# EAGLE board project-tsc-2d-pcb (EAGLE 9.7.0)
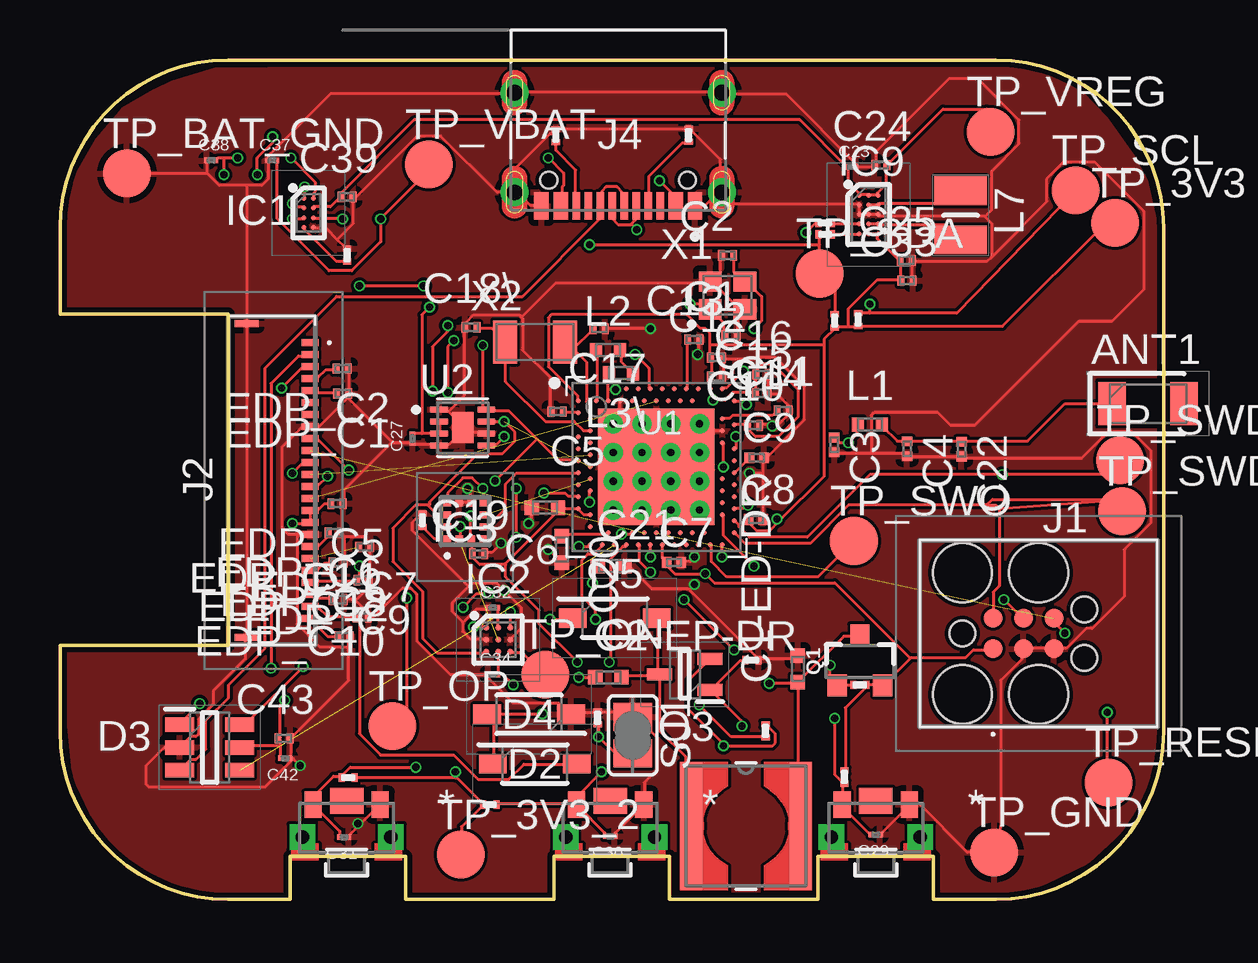
[diagram p0: board, top side]
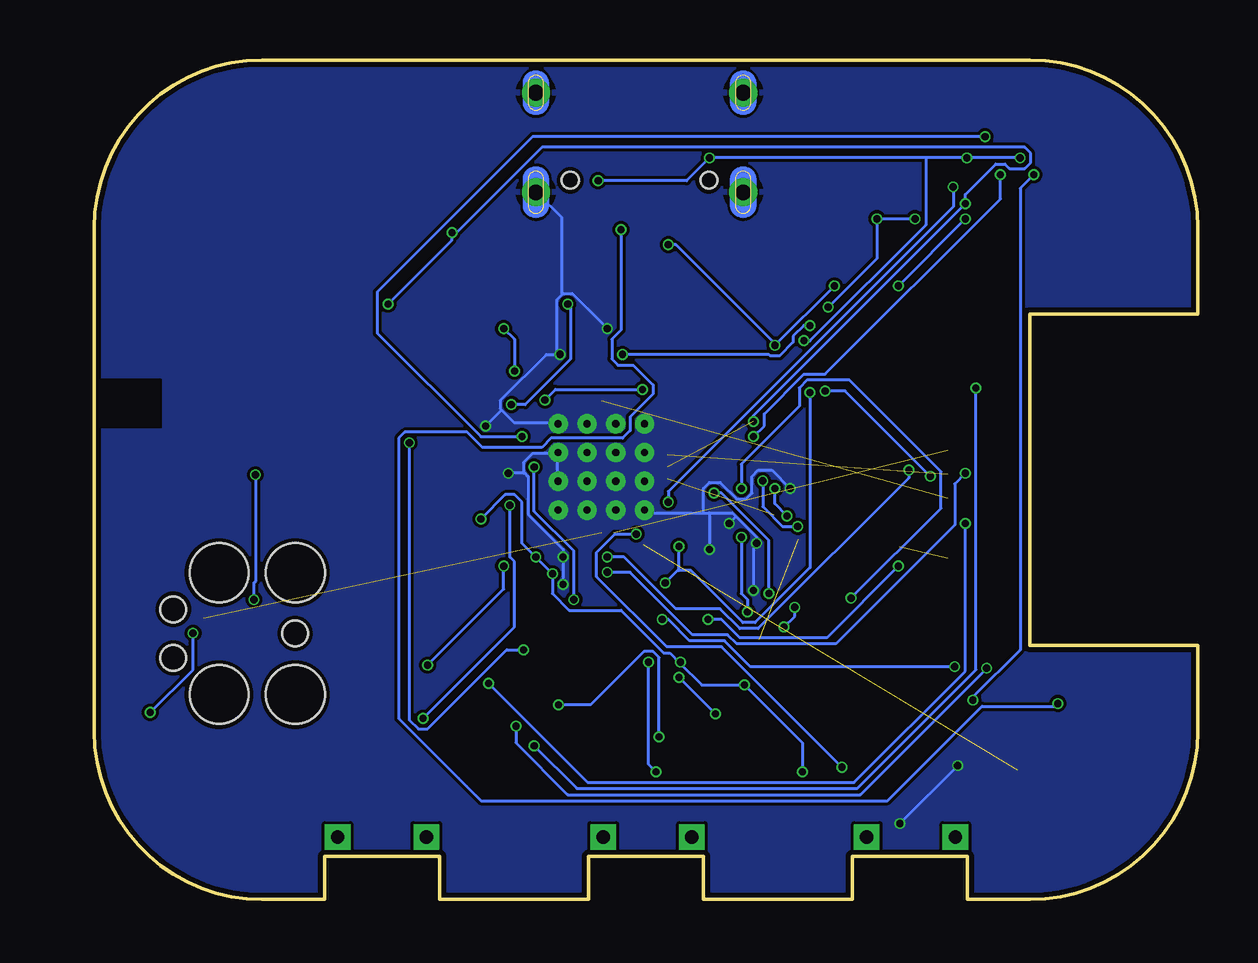
[diagram p1: board, bottom side, seen from below]

Size 46 x 35 mm. Coordinates in mm from the lower left corner, seen from the top.
Outline: 39,0 36.4,0 36.4,1.8 31.6,1.8 31.6,0 25.4,0 25.4,1.8 20.6,1.8 20.6,0 14.4,0 14.4,1.8 9.6,1.8 9.6,0 7,0 arc-90 0,7 0,10.6 7,10.6 7,24.4 0,24.4 0,28 arc-90 7,35 39,35 arc-90 46,28 46,7 arc-90 39,0
Copper layers (1*16): Top 0.035mm / dielectric 1.6mm / Bottom 0.035mm
Design rules "jlcpcb-2layers.dru": minimum track width 5mil, minimum drill 0.3mm, track to track 5mil, track to pad 5mil, pad to pad 5mil, via to via 5mil, smd to smd 5mil, copper to edge 0.2mm, drill to drill 6mil, minimum pad ring 10mil, minimum via ring 3mil, stop-mask expansion 4mil, vias tented up to drill 0mil, thermal gap 10mil

## Footprints (pad centres in the part's own frame; a part is rotated, then mirrored left to right if it is on the bottom)
2450AT18B100E_ANTC3216X140N = smd 1.15 x 1.8: 1 -1.5,0; 2 1.5,0
NORDIC_NRF_3_RESC0201_L = smd 0.28 x 0.43: 1 -0.255,0; 2 0.255,0
NORDIC_NRF_3_RESC0402_N = smd 0.6 x 0.6: 1 -0.55,0; 2 0.55,0
NORDIC_NRF_3_RESC0201_N = smd 0.4 x 0.45: 1 -0.305,0; 2 0.305,0
GRM011R60J152KE01L_2_CAPC0201X13N = smd 0.22 x 0.23: 1 -0.185,0; 2 0.185,0
ESP32_C6_LIBRARY_5_SOD3716X135N = smd 1.15 x 0.8: 1 -1.75,0; 2 1.75,0
ESP32_C6_LIBRARY_3_SOT95P280X145-6N = smd 1.2 x 0.6: 1 -1.25,0.95; 2 -1.25,0; 3 -1.25,-0.95; 4 1.25,-0.95; 5 1.25,0; 6 1.25,0.95
BQ25180YBGR_BGA8C40P2X4_100X155X50 = smd 0.2 x 0.2: A1 -0.2,0.6; A2 0.2,0.6; B1 -0.2,0.2; B2 0.2,0.2; C1 -0.2,-0.2; C2 0.2,-0.2; D1 -0.2,-0.6; D2 0.2,-0.6
DRV2605YZFR_BGA9C50P3X3_144X144X62 = smd 0.25 x 0.25: A1 -0.5,0.5; A2 0,0.5; A3 0.5,0.5; B1 -0.5,0; B2 0,0; B3 0.5,0; C1 -0.5,-0.5; C2 0,-0.5; C3 0.5,-0.5
BMA423_BMA423 = smd 0.3 x 0.35: 1 -0.75,-0.775; 2 -0.25,-0.775; 3 0.25,-0.775; 4 0.75,-0.775; 7 0.75,0.775; 8 0.25,0.775; 9 -0.25,0.775; 10 -0.75,0.775 | smd 0.35 x 0.3: 5 0.775,-0.25; 6 0.775,0.25; 11 -0.775,0.25; 12 -0.775,-0.25
RT6160AWSC_BGA15C40P3X5_140X230X60 = smd 0.216 x 0.216: A1 -0.4,0.8; A2 0,0.8; A3 0.4,0.8; B1 -0.4,0.4; B2 0,0.4; B3 0.4,0.4; C1 -0.4,0; C2 0,0; C3 0.4,0; D1 -0.4,-0.4; D2 0,-0.4; D3 0.4,-0.4; E1 -0.4,-0.8; E2 0,-0.8; E3 0.4,-0.8
TC2030-IDC_TC2030IDC = smd 0.783 x 0.783: 1 -0.953,-0.635; 2 -0.953,0.635; 3 0.317,-0.635; 4 0.317,0.635; 5 1.588,-0.635; 6 1.588,0.635 | hole 2.451: -2.223,-2.54; -2.223,2.54; 0.952,-2.54; 0.952,2.54 | hole 1.067: -2.223,0; 2.857,-1.016; 2.857,1.016
503480-2400_5034802400 = smd 0.3 x 0.7: 1 -5.75,1.525; 2 -5.25,1.525; 3 -4.75,1.525; 4 -4.25,1.525; 5 -3.75,1.525; 6 -3.25,1.525; 7 -2.75,1.525; 8 -2.25,1.525; 9 -1.75,1.525; 10 -1.25,1.525; 11 -0.75,1.525; 12 -0.25,1.525; 13 0.25,1.525; 14 0.75,1.525; 15 1.25,1.525; 16 1.75,1.525; 17 2.25,1.525; 18 2.75,1.525; 19 3.25,1.525; 20 3.75,1.525; 21 4.25,1.525; 22 4.75,1.525; 23 5.25,1.525; 24 5.75,1.525 | smd 0.3 x 1: MP1 -6.54,-1.125; MP2 6.54,-1.125
KH-TYPE-C-16P_KINGHELM_KH-TYPE-C-16P = smd 0.6 x 1.15: A1_B12 -3.2,4.725; A4_B9 -2.4,4.725; A9_B4 2.4,4.725; A12_B1 3.2,4.725 | smd 0.3 x 1.15: A5 -1.25,4.725; A6 -0.25,4.725; A7 0.25,4.725; A8 1.25,4.725; B5 1.75,4.725; B6 0.75,4.725; B7 -0.75,4.725; B8 -1.75,4.725 | drill 0.65 pad 1.05: SH1 -4.32,0; SH2 4.32,0; SH3 -4.32,4.15; SH4 4.32,4.15 | hole 0.7: -2.89,3.65; 2.89,3.65
NORDIC_NRF_2_RESC0402_L = smd 0.5 x 0.6: 1 -0.5,0; 2 0.5,0
ESP32_C6_LIBRARY_2_IND_4828-WE-TPC_WRE = smd 0.9 x 5.3: 1 -2.286,0; 2 2.286,0
MLP2016SR47MT0S1_INDC2016X100N = smd 1.2 x 2.2: 1 -1.028,0; 2 1.028,0
ESP32_C6_LIBRARY_4_ESP32_C6_LIBRARY_4_ESP32_C6_LIBRARY_4_ESP32_C6_LIBRARY_4_ESP32_WROVER_SPARKFUN-DISCRETESEMI_SOT23-3 = smd 0.8 x 0.9: 1 -0.95,-1; 2 0.95,-1; 3 0,1.1
ESP32_C6_LIBRARY_6_SOT65P210X110-3N = smd 1.05 x 0.5: 1 -1.05,0.65; 2 -1.05,-0.65; 3 1.05,0
CPF0201D7K68C1_0201 = smd 0.35 x 0.25: 1 0,0.275; 2 0,-0.275
ESP32_C6_LIBRARY_7_JUMPER_SJ = smd 1.168 x 1.6: 1 -0.762,0; 2 0.762,0
2025-10-22_07-23-44_LIBRARY_SW_EVP-AKE31A_PAN = smd 0.711 x 1.092: 1 -1.4,-0.972; 2 1.4,-0.972 | drill 0.559 pad 0.914 square: 3 -1.848,0.381; 4 1.848,0.381 | smd 1.397 x 1.092: 5 0,-1.124
HECTOR_WATCH_1_TP20R = smd 2 x 2: TP 0,0
NORDIC_NRF_4_AQFN50P700X700X85_HS-74N = smd 4.85 x 4.85: P$74 0,0 | drill 0.3 pad 0.6: P$75 -1.8,1.8; P$76 -0.6,1.8; P$77 0.6,1.8; P$78 1.8,1.8; P$79 -1.8,0.6; P$80 -0.6,0.6; P$81 0.6,0.6; P$82 1.8,0.6; P$83 -1.8,-0.6; P$84 -0.6,-0.6; P$85 0.6,-0.6; P$86 1.8,-0.6; P$87 -1.8,-1.8; P$88 -0.6,-1.8; P$89 0.6,-1.8; P$90 1.8,-1.8 | smd 0.2 x 0.2: P$A8 -1.25,3.25; P$A10 -0.75,3.25; P$A12 -0.25,3.25; P$A14 0.25,3.25; P$A16 0.75,3.25; P$A18 1.25,3.25; P$A20 1.75,3.25; P$A22 2.25,3.25; P$A23 2.75,3.25; P$AA24 3.25,-2.25; P$AB2 -2.75,-2.5; P$AC5 -2,-2.75; P$AC9 -1,-2.75; P$AC11 -0.5,-2.75; P$AC13 0,-2.75; P$AC15 0.5,-2.75; P$AC17 1,-2.75; P$AC19 1.5,-2.75; P$AC21 2,-2.75; P$AC24 3.25,-2.75; P$AD2 -2.75,-3.25; P$AD4 -2.25,-3.25; P$AD6 -1.75,-3.25; P$AD8 -1.25,-3.25; P$AD10 -0.75,-3.25; P$AD12 -0.25,-3.25; P$AD14 0.25,-3.25; P$AD16 0.75,-3.25; P$AD18 1.25,-3.25; P$AD20 1.75,-3.25; P$AD22 2.25,-3.25; P$AD23 2.75,-3.25; P$B1 -3.25,2.75; P$B3 -2.5,2.75; P$B5 -2,2.75; P$B7 -1.5,2.75; P$B9 -1,2.75; P$B11 -0.5,2.75; P$B13 0,2.75; P$B15 0.5,2.75; P$B17 1,2.75; P$B19 1.5,2.75; P$B24 3.25,2.75; P$C1 -3.25,2.25; P$D2 -2.75,2; P$D23 2.75,2; P$E24 3.25,1.75; P$F2 -2.75,1.5; P$F23 2.75,1.5; P$G1 -3.25,1.25; P$H2 -2.75,1; P$H23 2.75,1; P$J1 -3.25,0.75; P$J24 3.25,0.75; P$K2 -2.75,0.5; P$L1 -3.25,0.25; P$L24 3.25,0.25; P$M2 -2.75,0; P$N1 -3.25,-0.25; P$N24 3.25,-0.25; P$P2 -2.75,-0.5; P$P23 2.75,-0.5; P$R1 -3.25,-0.75; P$R24 3.25,-0.75; P$T2 -2.75,-1; P$T23 2.75,-1; P$U1 -3.25,-1.25; P$U24 3.25,-1.25; P$V23 2.75,-1.5; P$W1 -3.25,-1.75; P$W24 3.25,-1.75; P$Y2 -2.75,-2; P$Y23 2.75,-2
ESP32_C6_LIBRARY_SON50P200X200X80-9N = smd 0.76 x 0.27: 1 -0.985,0.75; 2 -0.985,0.25; 3 -0.985,-0.25; 4 -0.985,-0.75; 5 0.985,-0.75; 6 0.985,-0.25; 7 0.985,0.25; 8 0.985,0.75 | smd 0.9 x 1.3: 9 0,0
NORDIC_NRF_BT-XTAL_2016_N = smd 0.95 x 0.85: 1 -0.725,-0.575; 2 0.725,-0.575; 3 0.725,0.575; 4 -0.725,0.575
NORDIC_NRF_1_XTAL_3215_N = smd 1 x 1.8: 1 -1.25,0; 2 1.25,0

## Placement (x,y rotation side)
ANT1  2450AT18B100E  [2450AT18B100E_ANTC3216X140N]  45.35,20.67 0 top
C1  12pF  [NORDIC_NRF_3_RESC0201_L]  27.97,23.51 0 top
C1-ED-DR  10uF  [NORDIC_NRF_3_RESC0402_N]  30.75,9.62 90 top
C2  12pF  [NORDIC_NRF_3_RESC0201_L]  27.82,26.86 0 top
C2-EP-DR  4.7uF  [NORDIC_NRF_3_RESC0402_N]  22.86,9.27 0 top
C3  1pF  [NORDIC_NRF_3_RESC0201_N]  32.27,18.96 270 top
C4  1pF  [NORDIC_NRF_3_RESC0201_N]  35.31,18.79 270 top
C5  100nF  [NORDIC_NRF_3_RESC0201_L]  20.72,20.34 180 top
C6  4.7uF  [NORDIC_NRF_3_RESC0402_N]  20.21,16.34 180 top
C7  100nF  [NORDIC_NRF_3_RESC0201_N]  25.59,14.05 0 top
C8  100nF  [NORDIC_NRF_3_RESC0201_N]  29.01,15.84 0 top
C9  820pF  [NORDIC_NRF_3_RESC0201_N]  29.05,18.41 0 top
C10  N.C.  [NORDIC_NRF_3_RESC0201_L]  28.91,19.77 0 top
C11  100pF  [NORDIC_NRF_3_RESC0201_L]  30.15,20.39 0 top
C12  100nF  [NORDIC_NRF_3_RESC0201_L]  27.37,22.59 0 top
C13  N.C.  [NORDIC_NRF_3_RESC0201_L]  26.42,23.34 0 top
C14  4.7uF  [NORDIC_NRF_3_RESC0201_L]  27.36,21.79 0 top
C15  1.0uF  [NORDIC_NRF_3_RESC0201_L]  29.25,21.11 0 top
C16  47nF  [NORDIC_NRF_3_RESC0201_L]  29.27,21.88 0 top
C17  12pF  [NORDIC_NRF_3_RESC0201_L]  22.47,23.8 180 top
C18\  12pF  [NORDIC_NRF_3_RESC0201_L]  17.13,23.85 0 top
C19  100nF  [NORDIC_NRF_3_RESC0201_L]  17.45,14.41 0 top
C20  4.7uF  [NORDIC_NRF_3_RESC0402_N]  20.92,14.6 270 top
C21  4.7uF  [NORDIC_NRF_3_RESC0402_N]  22.97,13.9 0 top
C22  N.C.  [NORDIC_NRF_3_RESC0201_N]  37.58,18.78 270 top
C23  0.1uF  [GRM011R60J152KE01L_2_CAPC0201X13N]  32.99,30.53 0 top
C24  10uF  [NORDIC_NRF_3_RESC0201_L]  34.21,30.62 0 top
C25  22uF  [NORDIC_NRF_3_RESC0201_L]  35.28,26.64 0 top
C27  0.1uF  [GRM011R60J152KE01L_2_CAPC0201X13N]  14.69,19.21 90 top
C29  1uF  [GRM011R60J152KE01L_2_CAPC0201X13N]  34,2.72 180 top
C30  1uF  [GRM011R60J152KE01L_2_CAPC0201X13N]  22.94,2.65 180 top
C31  1uF  [GRM011R60J152KE01L_2_CAPC0201X13N]  11.84,2.61 180 top
C32  1uF  [GRM011R60J152KE01L_2_CAPC0201X13N]  18.04,12.17 0 top
C33  22uF  [NORDIC_NRF_3_RESC0201_L]  35.3,25.8 0 top
C34  0.1uF  [GRM011R60J152KE01L_2_CAPC0201X13N]  18.04,9.38 0 top
C37  1uF  [GRM011R60J152KE01L_2_CAPC0201X13N]  8.85,30.81 0 top
C38  1uF  [GRM011R60J152KE01L_2_CAPC0201X13N]  6.31,30.81 0 top
C39  10uF  [NORDIC_NRF_3_RESC0201_L]  11.96,29.29 0 top
C42  0.1uF  [GRM011R60J152KE01L_2_CAPC0201X13N]  9.38,5.89 180 top
C43  4.7uF  [NORDIC_NRF_3_RESC0201_L]  9.34,6.72 0 top
D2  MBR0530  [ESP32_C6_LIBRARY_5_SOD3716X135N]  19.79,5.65 0 top
D3  USBLC6-2SC6Y  [ESP32_C6_LIBRARY_3_SOT95P280X145-6N]  6.24,6.34 0 top
D4  MBR0530  [ESP32_C6_LIBRARY_5_SOD3716X135N]  19.55,7.73 180 top
D5  MBR0530  [ESP32_C6_LIBRARY_5_SOD3716X135N]  23.12,11.73 0 top
EDP_C1  10uF  [NORDIC_NRF_3_RESC0201_L]  11.78,21.1 180 top
EDP_C2  10uF  [NORDIC_NRF_3_RESC0201_L]  11.76,22.14 180 top
EDP_C5  0.1uF/50V  [NORDIC_NRF_3_RESC0201_L]  11.54,16.51 180 top
EDP_C6  1uF/50V  [NORDIC_NRF_3_RESC0201_L]  11.43,15.29 180 top
EDP_C7  1uF/50V  [NORDIC_NRF_3_RESC0201_L]  12.7,14.7 180 top
EDP_C8  1uF/50V  [NORDIC_NRF_3_RESC0201_L]  11.6,14.05 180 top
EDP_C9  1uF/50V  [NORDIC_NRF_3_RESC0201_L]  12.63,13.31 180 top
EDP_C10  1uF/50V  [NORDIC_NRF_3_RESC0201_L]  11.6,12.5 180 top
EDP_C11  1uF/50V  [NORDIC_NRF_3_RESC0201_L]  12.6,11.78 0 top
EDP_C12  1uF/50V  [NORDIC_NRF_3_RESC0201_L]  11.84,10.96 0 top
IC1  BQ25180YBGR  [BQ25180YBGR_BGA8C40P2X4_100X155X50]  10.36,28.62 0 top
IC2  DRV2605YZFR  [DRV2605YZFR_BGA9C50P3X3_144X144X62]  18.26,10.84 0 top
IC3  BMA421  [BMA423_BMA423]  16.89,15.78 0 top
IC9  RT6160AWSC  [RT6160AWSC_BGA15C40P3X5_140X230X60]  33.71,28.56 0 top
J1  TC2030-IDC_TC2030-IDC  [TC2030-IDC_TC2030IDC]  39.84,11.09 0 top
J2  503480-2400_503480-2400  [503480-2400_5034802400]  8.9,17.46 270 top
J4  KH-TYPE-C-16P  [KH-TYPE-C-16P_KINGHELM_KH-TYPE-C-16P]  23.27,33.64 180 top
L1  3.9nH  [NORDIC_NRF_2_RESC0402_L]  33.76,19.8 0 top
L2  10uH  [NORDIC_NRF_2_RESC0402_L]  22.84,22.91 0 top
L3\  15nH  [NORDIC_NRF_2_RESC0402_L]  23.38,21.94 180 top
L5  68uH  [ESP32_C6_LIBRARY_2_IND_4828-WE-TPC_WRE]  28.59,3.07 0 top
L7  FTC252012SR47MBCA  [MLP2016SR47MT0S1_INDC2016X100N]  37.54,28.52 270 top
Q1  20V/4.2A/52mΩ/1.4W  [ESP32_C6_LIBRARY_4_ESP32_C6_LIBRARY_4_ESP32_C6_LIBRARY_4_ESP32_C6_LIBRARY_4_ESP32_WROVER_SPARKFUN-DISCRETESEMI_SOT23-3]  33.34,9.93 0 top
Q3  SI1308EDL-T1-GE3  [ESP32_C6_LIBRARY_6_SOT65P210X110-3N]  26.04,9.39 180 top
R1  10K  [CPF0201D7K68C1_0201]  31.89,28.2 90 top
R1_EP_DR1  0.47  [CPF0201D7K68C1_0201]  29.41,7.03 0 top
R1_USB  5K1  [CPF0201D7K68C1_0201]  26.2,31.86 0 top
R2  10K  [CPF0201D7K68C1_0201]  31.89,27.72 90 top
R2_EP_DR  10K  [CPF0201D7K68C1_0201]  28.84,9.98 90 top
R2_USB  5K1  [CPF0201D7K68C1_0201]  20.67,31.84 180 top
R3  0  [CPF0201D7K68C1_0201]  15.11,15.81 0 top
R5  10K  [CPF0201D7K68C1_0201]  17.91,3.96 90 top
R7  10K  [CPF0201D7K68C1_0201]  32.7,5.11 0 top
R8  10K  [CPF0201D7K68C1_0201]  12.01,5.08 270 top
R9  10K  [CPF0201D7K68C1_0201]  11.97,26.86 0 top
R17  3K3  [CPF0201D7K68C1_0201]  33.27,24.18 0 top
R18  3K3  [CPF0201D7K68C1_0201]  32.3,24.13 0 top
R_PWR_EPD  10K  [CPF0201D7K68C1_0201]  33.34,8.95 270 top
R_TYPE_SEL  2.2  [CPF0201D7K68C1_0201]  22.41,7.57 180 top
SJ1  [ESP32_C6_LIBRARY_7_JUMPER_SJ]  23.87,6.85 270 top
SW_DN  2025-10-22_07-23-44_LIBRARY_EVP-AKE31ASW_EVP-AKE31A_PAN  [2025-10-22_07-23-44_LIBRARY_SW_EVP-AKE31A_PAN]  34,2.99 180 top
SW_ENT  2025-10-22_07-23-44_LIBRARY_EVP-AKE31ASW_EVP-AKE31A_PAN  [2025-10-22_07-23-44_LIBRARY_SW_EVP-AKE31A_PAN]  11.95,2.99 180 top
SW_UP  2025-10-22_07-23-44_LIBRARY_EVP-AKE31ASW_EVP-AKE31A_PAN  [2025-10-22_07-23-44_LIBRARY_SW_EVP-AKE31A_PAN]  22.93,2.99 180 top
TP_3V3  HECTOR_WATCH_1_TPTP20R  [HECTOR_WATCH_1_TP20R]  43.98,28.2 0 top
TP_3V3_2  HECTOR_WATCH_1_TPTP20R  [HECTOR_WATCH_1_TP20R]  16.7,1.87 0 top
TP_BAT_GND  HECTOR_WATCH_1_TPTP20R  [HECTOR_WATCH_1_TP20R]  2.78,30.26 0 top
TP_GND  HECTOR_WATCH_1_TPTP20R  [HECTOR_WATCH_1_TP20R]  38.94,1.97 0 top
TP_ON  HECTOR_WATCH_1_TPTP20R  [HECTOR_WATCH_1_TP20R]  20.22,9.38 0 top
TP_OP  HECTOR_WATCH_1_TPTP20R  [HECTOR_WATCH_1_TP20R]  13.86,7.22 0 top
TP_RESET  HECTOR_WATCH_1_TPTP20R  [HECTOR_WATCH_1_TP20R]  43.71,4.88 0 top
TP_SCL  HECTOR_WATCH_1_TPTP20R  [HECTOR_WATCH_1_TP20R]  42.33,29.56 0 top
TP_SDA  HECTOR_WATCH_1_TPTP20R  [HECTOR_WATCH_1_TP20R]  31.67,26.09 0 top
TP_SWDCLK  HECTOR_WATCH_1_TPTP20R  [HECTOR_WATCH_1_TP20R]  44.19,18.31 0 top
TP_SWDIO  HECTOR_WATCH_1_TPTP20R  [HECTOR_WATCH_1_TP20R]  44.28,16.19 0 top
TP_SWO  HECTOR_WATCH_1_TPTP20R  [HECTOR_WATCH_1_TP20R]  33.09,14.95 0 top
TP_VBAT  HECTOR_WATCH_1_TPTP20R  [HECTOR_WATCH_1_TP20R]  15.38,30.64 0 top
TP_VREG  HECTOR_WATCH_1_TPTP20R  [HECTOR_WATCH_1_TP20R]  38.78,32.01 0 top
U1  NRF52840_QF  [NORDIC_NRF_4_AQFN50P700X700X85_HS-74N]  24.86,18.04 0 top
U2  ESP32_C6_LIBRARY_MAX17048G+T10  [ESP32_C6_LIBRARY_SON50P200X200X80-9N]  16.79,19.67 0 top
X1  32MHz  [NORDIC_NRF_BT-XTAL_2016_N]  27.83,25.19 0 top
X2  32.726kHz  [NORDIC_NRF_1_XTAL_3215_N]  19.81,23.24 0 top

## Library data of the parts
ANT1 = InkTime_v5; ARROW_PART_NUMBER: 2450AT18B100E; ARROW_PRICE-STOCK: https://www.arrow.com/en/products/2450at18b100e/johanson-dielectrics?utm_currency=USD&region=nac; DESCRIPTION: Antennas 2.45GHz ANTENNA; HEIGHT: 1.4mm; MANUFACTURER_NAME: JOHANSON TECHNOLOGY; MANUFACTURER_PART_NUMBER: 2450AT18B100E; MOUSER_PART_NUMBER: 609-2450AT18B100E; MOUSER_PRICE-STOCK: https://www.mouser.co.uk/ProductDetail/Johanson-Technology/2450AT18B100E?qs=yCnrNFeXz%252Bh5MFsFIXGZGA%3D%3D
C1 C1-ED-DR C2 C2-EP-DR C3-C17 C18\ C19-C22 C24 C25 C33 C39 C43 EDP_C1 EDP_C2 EDP_C5-EDP_C12 L1 L2 L3\ R1 R1_EP_DR1 R1_USB R2 R2_EP_DR R2_USB R3 R5 R7-R9 R17 R18 R_PWR_EPD R_TYPE_SEL SJ1 TP_3V3 TP_3V3_2 TP_BAT_GND TP_GND TP_ON TP_OP TP_RESET TP_SCL TP_SDA TP_SWDCLK TP_SWDIO TP_SWO TP_VBAT TP_VREG U1 X1 X2 = InkTime_v5
C23 C27 C29-C32 C34 C37 C38 C42 = InkTime_v5; AVAILABILITY: In Stock; CHECK_PRICES: https://www.snapeda.com/parts/GRM011R60J152KE01L/Murata/view-part/?ref=eda; DESCRIPTION: SMD Capacitor X5R(EIA) with Capacitance: 1500pF Tol. 10%. Rated Voltage: 6.3Vdc; MF: Murata; MP: GRM011R60J152KE01L; PACKAGE: 0201 Murata; PRICE: None; SNAPEDA_LINK: https://www.snapeda.com/parts/GRM011R60J152KE01L/Murata/view-part/?ref=snap
D2 D4 D5 = InkTime_v5; AVAILABILITY: In Stock; CHECK_PRICES: https://www.snapeda.com/parts/MBR0530/Onsemi/view-part/?ref=eda; DESCRIPTION: Diode Schottky 30 V 500mA Surface Mount SOD-123; MF: ON Semiconductor; MP: MBR0530; PACKAGE: SOD-123-2 ON Semiconductor; PRICE: None; PURCHASE-URL: https://www.snapeda.com/api/url_track_click_mouser/?unipart_id=179458&manufacturer=ON Semiconductor&part_name=MBR0530&search_term=None; SNAPEDA_LINK: https://www.snapeda.com/parts/MBR0530/Onsemi/view-part/?ref=snap
D3 = InkTime_v5; AVAILABILITY: In Stock; CHECK_PRICES: https://www.snapeda.com/parts/USBLC6-2SC6Y/STMicroelectronics/view-part/?ref=eda; DESCRIPTION: 17V Clamp 5A (8/20µs) Ipp Tvs Diode Surface Mount SOT-23-6; MF: STMicroelectronics; MP: USBLC6-2SC6Y; PACKAGE: SOT-23-6 STMicroelectronics; PRICE: None; SNAPEDA_LINK: https://www.snapeda.com/parts/USBLC6-2SC6Y/STMicroelectronics/view-part/?ref=snap
IC1 = InkTime_v5; ARROW_PART_NUMBER: BQ25180YBGR; ARROW_PRICE-STOCK: https://www.arrow.com/en/products/bq25180ybgr/texas-instruments?utm_currency=USD&region=nac; DESCRIPTION: Charger IC Lithium Ion/Polymer, Lithium Iron Phosphate 8-DSBGA (1.6x1.1); HEIGHT: 0.5mm; MANUFACTURER_NAME: Texas Instruments; MANUFACTURER_PART_NUMBER: BQ25180YBGR; MOUSER_PART_NUMBER: 595-BQ25180YBGR; MOUSER_PRICE-STOCK: https://www.mouser.co.uk/ProductDetail/Texas-Instruments/BQ25180YBGR?qs=doiCPypUmgEWjAK%252BJAX6Tw%3D%3D
IC2 = InkTime_v5; ARROW_PART_NUMBER: DRV2605YZFR; ARROW_PRICE-STOCK: https://www.arrow.com/en/products/drv2605yzfr/texas-instruments?region=nac; DESCRIPTION: Haptic Driver for ERM/LRA with Built-In Library and Smart Loop Architecture; HEIGHT: 0.625mm; MANUFACTURER_NAME: Texas Instruments; MANUFACTURER_PART_NUMBER: DRV2605YZFR
IC3 = InkTime_v5; ARROW_PART_NUMBER: BMA423; ARROW_PRICE-STOCK: https://www.arrow.com/en/products/bma423/bosch; DESCRIPTION: Accelerometers Triaxial low-g 12bit Acceleration Sensor; HEIGHT: 1mm; MANUFACTURER_NAME: BOSCH; MANUFACTURER_PART_NUMBER: BMA423; MOUSER_PART_NUMBER: 262-BMA423; MOUSER_PRICE-STOCK: https://www.mouser.co.uk/ProductDetail/Bosch-Sensortec/BMA423?qs=HXFqYaX1Q2xC%252BSgeGoX3mg%3D%3D
IC9 = InkTime_v5; DESCRIPTION: Buck-Boost Regulator Positive Output Step-Up/Step-Down I2C DC-DC Controller IC 15-WL-CSP (BSC) (1.4x2.3); HEIGHT: 0.6mm; MANUFACTURER_NAME: RICHTEK; MANUFACTURER_PART_NUMBER: RT6160AWSC; MOUSER_PART_NUMBER: 835-RT6160AWSC; MOUSER_PRICE-STOCK: https://www.mouser.co.uk/ProductDetail/Richtek/RT6160AWSC?qs=amGC7iS6iy%2FLd9PSoixZXQ%3D%3D
J1 = InkTime_v5; DESCRIPTION: CABLE ADAPTER 6 POS; HEIGHT: 19mm; MANUFACTURER_NAME: Tag Connect; MANUFACTURER_PART_NUMBER: TC2030-IDC
J2 = InkTime_v5; DESCRIPTION: FFC & FPC Connectors 0.5mm FPC RA SMT Dual Contact 24Ckt; HEIGHT: 1.87mm; MANUFACTURER_NAME: Molex; MANUFACTURER_PART_NUMBER: 503480-2400; MOUSER_PART_NUMBER: 538-503480-2400; MOUSER_PRICE-STOCK: https://www.mouser.co.uk/ProductDetail/Molex/503480-2400?qs=OAhjpuo3Vu7efIoxFh9AOw%3D%3D
J4 = InkTime_v5; AVAILABILITY: Not in stock; CHECK_PRICES: https://www.snapeda.com/parts/KH-TYPE-C-16P/Kinghelm/view-part/?ref=eda; MF: kinghelm; MP: KH-TYPE-C-16P; PACKAGE: None; PRICE: None; SNAPEDA_LINK: https://www.snapeda.com/parts/KH-TYPE-C-16P/Kinghelm/view-part/?ref=snap
L5 = InkTime_v5; COPYRIGHT: Copyright (C) 2024 Ultra Librarian. All rights reserved.; MANUFACTURER_PART_NUMBER: 744043680; MFR_NAME: Wurth Electronics
L7 = InkTime_v5; DESCRIPTION: SMD / SMT Inductors (Coils), L=0.47?H, L x W x T :; HEIGHT: 1mm; JLCPCB: https://jlcpcb.com/partdetail/6763488-FTC252012SR47MBCA/C5832368; MANUFACTURER_NAME: TDK; MANUFACTURER_PART_NUMBER: FTC252012SR47MBCA
Q1 = InkTime_v5; PROD_ID: TRAN-14388
Q3 = InkTime_v5; AVAILABILITY: In Stock; CHECK_PRICES: https://www.snapeda.com/parts/SI1308EDL-T1-GE3/Vishay+Siliconix/view-part/?ref=eda; DESCRIPTION: Si1308EDL-T1-GE3 N-channel MOSFET Transistor, 1.5 A, 30 V, 3-Pin SC-70 | Siliconix / Vishay SI1308EDL-T1-GE3; MF: Vishay Siliconix; MP: SI1308EDL-T1-GE3; PACKAGE: SOT-323 Vishay Semiconductor; PRICE: None; PURCHASE-URL: https://www.snapeda.com/api/url_track_click_mouser/?unipart_id=274603&manufacturer=Vishay Siliconix&part_name=SI1308EDL-T1-GE3&search_term=None; SNAPEDA_LINK: https://www.snapeda.com/parts/SI1308EDL-T1-GE3/Vishay+Siliconix/view-part/?ref=snap
SW_DN SW_ENT SW_UP = InkTime_v5; COPYRIGHT: Copyright (C) 2025 Ultra Librarian. All rights reserved.; DIGI-KEY_PART_NUMBER_1: P123437TR-ND; DIGI-KEY_PART_NUMBER_2: P123437CT-ND; DIGI-KEY_PART_NUMBER_3: P123437DKR-ND; MANUFACTURER_NAME: Panasonic; MANUFACTURER_PART_NUMBER: EVP-AKE31A
U2 = InkTime_v5; AVAILABILITY: In Stock; CHECK_PRICES: https://www.snapeda.com/parts/MAX17048G+T10/Analog+Devices/view-part/?ref=eda; DESCRIPTION: 3µA 1-Cell/2-Cell Fuel Gauge with ModelGauge; MF: Analog Devices; MP: MAX17048G+T10; PACKAGE: TDFN-8 Maxim; PRICE: None; PURCHASE-URL: https://www.snapeda.com/api/url_track_click_mouser/?unipart_id=329239&manufacturer=Analog Devices&part_name=MAX17048G+T10&search_term=None; SNAPEDA_LINK: https://www.snapeda.com/parts/MAX17048G+T10/Analog+Devices/view-part/?ref=snap

## Nets
3V1: C5.1 U1.P$C1
3V3 [POWER]: C6.1 C7.1 C8.1 C12.1 C14.1 C19.1 C25.1 C33.1 C34.2 IC2.C2 IC3.3 IC3.7 IC3.10 IC9.E2 IC9.E3 J1.1 Q1.2 R5.1 R7.1 R8.1 R17.2 R18.2 R_PWR_EPD.1 TP_3V3.TP TP_3V3_2.TP U1.P$A22 U1.P$AD14 U1.P$AD23 U1.P$B1 U1.P$W1 U1.P$Y2
ALERT: U1.P$J24 U2.5
D+: D3.4 U1.P$AD6
D-: D3.6 U1.P$AD4
DN: D3.1 J4.A7 J4.B7
DP: D3.3 J4.A6 J4.B6
EPD_3V3 [POWER]: C1-ED-DR.1 EDP_C5.2 J2.15 J2.16 L5.2 Q1.3
EPD_BUSY: J2.9 U1.P$AD12
EPD_CS: J2.12 U1.P$K2
EPD_DC: J2.11 U1.P$AD10
EPD_RST: J2.10 U1.P$AC11
ESP_3V1: EDP_C6.2 J2.18
ESP_3V2: EDP_C7.2 J2.19
ESP_3V4: EDP_C8.2 J2.20
ESP_3V6: EDP_C10.2 J2.22
GDR: J2.2 Q3.1 R2_EP_DR.1
GND [POWER]: C1-ED-DR.2 C1.2 C2.1 C3.2 C4.2 C5.2 C6.2 C7.2 C8.2 C9.2 C10.2 C11.2 C12.2 C13.2 C14.2 C15.2 C16.2 C17.1 C18\.1 C19.2 C20.2 C21.2 C22.2 C23.2 C24.1 C25.2 C27.1 C29.1 C30.1 C31.1 C32.1 C33.2 C34.1 C37.1 C38.1 C39.2 C42.1 C43.2 D3.2 D4.1 EDP_C1.1 EDP_C2.1 EDP_C5.1 EDP_C6.1 EDP_C7.1 EDP_C8.1 EDP_C9.1 EDP_C10.1 EDP_C11.2 EDP_C12.2 IC1.D2 IC2.B1 IC2.B3 IC3.8 IC3.9 IC9.B1 IC9.C1 IC9.C2 IC9.C3 J1.3 J1.5 J2.8 J2.17 J2.MP1 J2.MP2 J4.A1_B12 J4.A12_B1 J4.SH1 J4.SH2 J4.SH3 J4.SH4 R1_USB.1 R2_EP_DR.2 R2_USB.2 R3.1 R9.1 R_TYPE_SEL.2 SJ1.1 SW_DN.1 SW_ENT.1 SW_UP.1 TP_BAT_GND.TP TP_GND.TP U1.P$74 U1.P$75 U1.P$76 U1.P$77 U1.P$78 U1.P$79 U1.P$80 U1.P$81 U1.P$82 U1.P$83 U1.P$84 U1.P$85 U1.P$86 U1.P$87 U1.P$88 U1.P$89 U1.P$90 U1.P$B7 U1.P$F23 U2.1 U2.4 U2.6 U2.9 X1.2 X1.4
GND1: C17.2 U1.P$D2 X2.2
GND2: C18\.2 U1.P$F2 X2.1
GND3: C2.2 U1.P$A23 X1.3
HAPTIC_EN: IC2.A1 U1.P$U1
IMU_INT1: IC3.5 U1.P$N1
IMU_INT2: IC3.6 U1.P$P2
LX1: IC9.B2 IC9.B3 L7.1
LX2: IC9.D2 IC9.D3 L7.2
MOSI: J2.14 U1.P$B13
N$1: L2.1 U1.P$B3
N$2: L2.2 L3\.1
N$3: C10.1 C15.1 C16.1 L3\.2 U1.P$B5 U1.P$E24
N$4: R1_EP_DR1.2 R_TYPE_SEL.1 SJ1.2
N$5: IC1.D1 R9.2
N$6: C2-EP-DR.2 D5.2 L5.1 Q3.3
N$7: C2-EP-DR.1 D2.1 D4.2
N$8: J4.A5 R1_USB.2
N$9: J4.B5 R2_USB.1
N$11: EDP_C2.2 J2.4
N$12: EDP_C1.2 J2.5
N$14: C32.2 IC2.A2
N$15: C13.1 U1.P$A18
N$19: C11.1 U1.P$D23
N$20: C1.1 U1.P$B24 X1.1
N$21: IC9.D1 R1.2
N$22: IC9.E1 R2.2
N$27: EDP_C12.1 J2.24
N$28: IC3.1 R3.2
N$39: C20.1 U1.P$AC5
N$69: C9.1 U1.P$N24
N$74: ANT1.1 C4.1 C22.1 L1.2
N$75: C3.1 L1.1 U1.P$H23
OUT+: IC2.A3 TP_OP.TP
OUT-: IC2.C3 TP_ON.TP
P0.04: U1.P$J1
P0.09: U1.P$L24
P0.13: C30.2 R5.2 SW_UP.2 U1.P$AD8
P0.14: C31.2 R8.2 SW_ENT.2 U1.P$AC9
P0.19: U1.P$AC15
P0.20: U1.P$AD16
P0.21: U1.P$AC17
P0.22: U1.P$AD18
P0.23: U1.P$AC19
P0.24: U1.P$AD20
P0.25: U1.P$AC21
P0.26: U1.P$G1
P0.27: U1.P$H2
P0.28: U1.P$B11
P0.29: U1.P$A10
P0.30: U1.P$B9
P0.31: U1.P$A8
P1.01: Q1.1 R_PWR_EPD.2 U1.P$Y23
P1.02: C29.2 R7.2 SW_DN.2 U1.P$W24
P1.03: U1.P$V23
P1.04: U1.P$U24
P1.05: U1.P$T23
P1.06: U1.P$R24
P1.07: U1.P$P23
P1.09: U1.P$R1
P1.10: U1.P$A20
P1.11: U1.P$B19
P1.12: U1.P$B17
P1.13: U1.P$A16
P1.14: U1.P$B15
P1.15: U1.P$A14
PMIC_INT: IC1.A1 U1.P$T2
PREVGH: D5.1 EDP_C9.2 J2.21
PREVGL: D2.2 EDP_C11.1 J2.23
RESE: J2.3 Q3.2 R1_EP_DR1.1
RESET: J1.6 TP_RESET.TP U1.P$AC13
SCK: J2.13 U1.P$A12
SCL: IC1.B1 IC2.C1 IC3.12 R1.1 R17.1 TP_SCL.TP U1.P$M2 U2.7
SDA: IC1.C1 IC2.B2 IC3.2 R2.1 R18.1 TP_SDA.TP U1.P$L1 U2.8
SWDCLK: J1.4 TP_SWDCLK.TP U1.P$AA24
SWDIO: J1.2 TP_SWDIO.TP U1.P$AC24
SWO: TP_SWO.TP U1.P$AD22
VBAT [POWER]: C27.2 C37.2 IC1.C2 TP_VBAT.TP U2.2 U2.3
VBUS [POWER]: C21.1 C38.2 C42.2 C43.1 D3.5 IC1.A2 J4.A4_B9 J4.A9_B4 U1.P$AD2
VREG [POWER]: C23.1 C24.2 C39.1 IC1.B2 IC9.A1 IC9.A2 IC9.A3 TP_VREG.TP

## Tracks (layer width: path | path; a pad name or v marks a point on that pad's centre or on a via)
3V1
  Top 0.127: U1.P$C1 21.56,20.31 20.99,20.31 C5.1
3V3  (via drill 0.3)
  Top 0.127: U1.P$A22 27.09,21.33 27.09,21.77 C14.1 27.15,21.84 27.15,22.53 C12.1 27.09,22.6 27.09,23.11 | 27.09,23.11 27.09,23.62 26.9,23.8 26.71,23.8 26.14,24.38 20.48,24.38 20.36,24.25 20.36,22.22 21.56,21.01 21.56,20.82 U1.P$B1 | IC9.E2 33.75,27.74 34.07,27.74 IC9.E3 34.07,27.68 34.07,27.55 34.96,26.66 C25.1 35.02,26.6 35.02,25.84 C33.1 34.96,25.84 34.07,25.84 32.87,24.63 32.87,23.87 | 32.87,23.87 33.25,23.87 R17.2 39.29,23.9 43.59,28.2 TP_3V3.TP | 32.87,23.87 32.36,23.87 R18.2 32.29,23.8 31.85,23.36 31.85,23.11 | 29.98,15.77 31.85,17.64 31.85,23.11 | 29.98,15.77 29.56,15.36 29.06,15.36 28.74,15.68 28.74,15.8 C8.1 | 31.85,23.11 27.09,23.11 | R7.1 32.74,5.39 32.74,7.99 33.56,8.82 33.56,8.95 R_PWR_EPD.1 33.63,8.95 34.26,8.95 Q1.2 34.33,8.95 35.44,10.06 | 35.44,10.06 35.47,10.09 37.76,10.09 38.07,10.41 38.84,10.41 J1.1 | 16.48,5.07 16.55,5.07 17.63,3.99 R5.1 17.63,3.93 16.74,3.04 16.74,1.9 TP_3V3_2.TP | 16.48,5.07 12.29,5.07 R8.1 | IC3.10 16.17,16.57 16.17,16.95 16.8,17.58 17.18,17.58 v17.63,17.14 17.63,16.57 IC3.7 | U1.P$Y2 22.07,16.06 21.82,16.06 21.63,16.25 U1.P$W1 21.56,16.31 20.8,16.31 C6.1 20.8,16.25 18.55,13.99 | 18.55,13.99 18.52,13.96 17.5,13.96 17.25,14.22 17.25,14.41 C19.1 17.18,14.47 17.18,14.98 IC3.3 17.12,15.04 v17.12,15.99 | IC2.C2 18.26,10.28 18.26,9.39 C34.2 18.32,9.39 18.45,9.39 v18.9,8.95 | U1.P$AD14 25.12,14.72 25.12,14.22 25.25,14.09 C7.1 25.31,14.03 25.31,13.9 25.63,13.58 v26.9,13.58 27.28,13.2 32.29,13.2 35.44,10.06 | v27.6,14.28 27.6,14.72 U1.P$AD23 | v21.56,9.9 19.98,11.49 19.98,12.06 18.58,13.45 18.58,13.96 18.55,13.99
  Top 0.127: v16.48,5.33 16.48,5.07 | v29.88,15.87 29.98,15.77
  Bottom 0.127: v17.63,17.14 17.63,16.5 v17.12,15.99 | 21.6,9.87 22.01,10.28 22.26,10.28 24.04,12.06 26.2,12.06 26.9,12.76 v26.9,13.58 v27.6,14.28 28.17,14.85 28.17,16.57 28.48,16.88 28.87,16.88 v29.88,15.87 | 21.6,9.87 20.67,8.95 v18.9,8.95 16.48,6.53 v16.48,5.33 | v21.56,9.9 21.6,9.87
ALERT  (via drill 0.3)
  Top 0.127: v28.17,19.3 28.17,18.79 U1.P$J24 | v8.86,31.81 8.86,31.55 8.23,30.92 v8.23,30.22 | v18.52,19.3 18.2,18.98 17.82,18.98 U2.5
  Bottom 0.127: v28.17,19.3 29.88,19.3 34.2,23.62 34.2,25.33 27.72,31.81 v8.86,31.81 | v8.23,30.22 8.23,29.2 15.53,21.9 16.42,21.9 18.07,20.25 18.07,19.74 v18.52,19.3
D+  (1 unrouted)
D-  (via drill 0.3)
  Top 0.127: v22.32,11.68 22.32,12.06 21.75,12.63 21.75,14.15 22.01,14.41 22.26,14.41 22.58,14.72 U1.P$AD4 | v10.13,9.71 7.83,7.41 D3.6
  Bottom 0.127: v22.32,11.68 22.07,11.68 21.18,10.79 19.72,10.79 18.64,9.71 v10.13,9.71
DN  (via drill 0.3)
  Top 0.127: 23.82,28.16 23.98,28.31 23.98,28.88 J4.B7 | 23.82,28.16 23.79,28.12 23.28,28.12 23.02,28.38 23.02,28.88 J4.A7 | 23.82,28.16 v24.04,27.93 | v5.83,8.17 4.99,7.33 D3.1
  Bottom 0.127: v24.04,27.93 24.04,23.74 24.42,23.36 24.42,22.53 24.17,22.28 23.53,22.28 22.71,21.46 22.71,21.07 23.66,20.12 23.66,19.55 23.98,19.23 26.96,19.23 27.34,18.85 29.82,18.85 30.45,19.49 33.06,19.49 33.31,19.23 33.31,7.55 29.88,4.12 12.93,4.12 8.99,8.06 5.94,8.06 v5.83,8.17
DP
  Top 0.127: J4.A6 23.47,28.95 23.47,29.46 23.21,29.71 22.77,29.71 22.58,29.52 22.58,28.95 J4.B6 22.52,28.88 22.52,28.38 19.28,25.14 11.53,25.14 8.55,22.15 8.55,10.47 7.02,8.95 7.02,8.41 6.08,7.47 6.08,6.26 5.67,5.85 5.45,5.85 D3.3
EPD_3V3  (via drill 0.3)
  Top 0.127: EDP_C5.2 11.28,16.5 11.02,16.5 10.77,16.25 10.45,16.25 J2.15 10.45,16.19 10.45,15.74 J2.16 10.39,15.68 v9.69,15.68 | C1-ED-DR.1 30.77,9.07 32.67,10.98 33.31,10.98 Q1.3 | v29.56,9.01 30.71,9.01 C1-ED-DR.1 | C1-ED-DR.1 30.75,3.19 L5.2
  Bottom 0.127: v9.69,15.68 9.69,9.52 14.32,4.88 25.44,4.88 v29.56,9.01
EPD_BUSY  (via drill 0.3)
  Top 0.127: v24.61,14.28 24.61,14.72 U1.P$AD12 | v12.04,17.9 10.77,19.17 10.45,19.17 J2.9
  Bottom 0.127: v24.61,14.28 23.91,14.28 21.75,12.12 19.91,12.12 19.09,11.3 18.32,11.3 12.04,17.58 v12.04,17.9
EPD_CS  (1 unrouted)
EPD_DC  (via drill 0.3)
  Top 0.127: v24.61,13.64 24.17,14.09 24.17,14.72 U1.P$AD10 | v9.69,17.77 10.07,18.15 10.39,18.15 J2.11
  Bottom 0.127: v24.61,13.64 23.66,13.64 21.05,11.04 19.59,11.04 19.21,10.66 15.09,10.66 10.13,15.61 10.13,17.33 v9.69,17.77
EPD_RST  (1 unrouted)
ESP_3V1
  Top 0.127: EDP_C6.2 11.15,15.23 11.15,15.11 10.77,14.72 10.45,14.72 J2.18
ESP_3V2  (1 unrouted)
ESP_3V4
  Top 0.127: EDP_C8.2 11.34,14.03 11.02,14.03 10.77,13.77 10.45,13.77 J2.20
ESP_3V6
  Top 0.127: EDP_C10.2 11.34,12.57 10.58,12.57 10.45,12.69 J2.22
GDR  (via drill 0.3)
  Top 0.127: R2_EP_DR.1 28.55,9.96 28.36,9.96 27.15,8.76 Q3.1 27.15,8.69 28.42,7.42 v28.42,7.23 | v8.8,9.64 8.8,21.52 9.94,22.66 10.39,22.66 J2.2
  Bottom 0.127: v8.8,9.64 14.07,4.37 26.26,4.37 28.42,6.53 v28.42,7.23
GND  (via drill 0.3)
  Top 0.127: C1.2 28.23,23.55 28.23,24.25 28.55,24.57 X1.2 28.42,24.5 27.15,25.77 | 27.15,25.77 27.53,26.15 27.53,26.85 C2.1 | 27.15,25.77 X1.4 27.09,25.71 20.67,25.71 19.25,24.28 | 19.25,24.28 19.15,24.38 17.25,24.38 16.93,24.06 16.93,23.87 C18\.1 16.86,23.8 16.86,21.01 16.2,20.34 | 19.25,24.28 19.28,24.25 19.28,22.92 20.42,21.77 20.42,20.38 C5.2 | 12.51,3.14 13.31,3.93 SW_ENT.1 | 12.51,3.14 12.04,2.66 C31.1 | 9.62,5.9 9.62,6.62 C43.2 9.64,6.74 12.04,9.14 12.04,10.53 | 9.62,5.9 C42.1 | 12.04,10.53 12.04,10.91 EDP_C12.2 | v12.42,3.17 12.48,3.17 12.51,3.14 | 9.72,5.87 9.69,5.9 9.62,5.9 | 9.72,5.87 v10.01,5.58 | C30.1 23.15,2.66 23.15,2.79 24.29,3.93 SW_UP.1 24.36,3.99 24.36,4.88 24.87,5.39 24.87,6.79 24.1,7.55 23.91,7.55 SJ1.1 23.85,7.61 23.66,7.8 22.45,7.8 R_TYPE_SEL.2 22.39,7.8 21.25,7.8 D4.1 21.25,7.74 20.8,8.18 18.9,8.18 17.88,9.2 17.88,9.33 C34.1 17.82,9.39 16.25,9.39 14.87,10.77 14.87,12.74 14.62,12.98 14.28,12.98 13.04,11.74 12.86,11.74 EDP_C11.2 12.8,11.8 12.8,11.99 12.32,12.47 | 11.85,15.11 11.85,14.09 EDP_C8.1 | 11.85,15.11 11.72,15.23 EDP_C6.1 11.78,15.23 11.78,16.5 EDP_C5.1 11.85,16.57 11.85,17.07 13.85,19.07 | 12.32,12.47 12.29,12.5 11.91,12.5 EDP_C10.1 | 12.32,12.47 12.86,13.01 12.86,13.26 EDP_C9.1 12.93,13.33 12.93,14.66 EDP_C7.1 12.93,14.72 12.93,14.85 12.67,15.11 11.85,15.11 | 16.2,20.34 16.74,19.8 16.74,19.68 U2.9 | 16.2,20.34 16.17,20.38 15.85,20.38 U2.1 | U2.6 17.75,19.49 16.93,19.49 16.8,19.61 U2.9 | U2.9 16.8,19.55 16.23,18.98 15.85,18.98 U2.4 15.79,18.98 14.71,18.98 C27.1 14.64,19.04 13.88,19.04 13.85,19.07 | EDP_C1.1 12.04,21.14 12.04,22.09 EDP_C2.1
  Top 0.127: 9.88,15.23 9.5,15.23 9.24,15.49 9.24,18.85 10.07,19.68 10.39,19.68 J2.8 10.45,19.74 10.83,19.74 12.04,20.95 12.04,21.07 EDP_C1.1 | 9.88,15.23 10.39,15.23 J2.17 | 13.85,19.07 12.04,20.88 EDP_C1.1 | 12.04,10.53 10.83,10.53 9.88,11.49 9.88,15.23 | 6.15,30.26 6.64,29.77 7.78,29.77 | 6.15,30.26 6.13,30.28 6.13,30.79 C38.1 | 7.78,29.77 8.42,29.77 8.67,30.03 8.67,30.79 C37.1 8.67,30.85 8.67,30.98 11.28,33.58 18.9,33.58 J4.SH2 27.53,33.65 J4.SH1 27.6,33.58 30.26,33.58 33.18,30.66 33.18,30.6 C23.2 33.18,30.54 33.88,30.54 33.95,30.6 C24.1 34.01,30.66 34.01,31.17 37.06,34.22 38.25,34.22 39.97,32.5 39.97,31.51 38.84,30.37 38.84,28.76 38.55,28.47 | 7.78,29.77 7.78,24.06 J2.MP1 7.78,10.98 J2.MP2 7.72,10.91 7.72,10.03 6.39,8.69 6.39,8.14 5.78,7.53 5.78,6.91 5.67,6.8 5.45,6.8 D3.2 4.35,6.34 3.58,5.57 3.58,4.82 3.7,4.7 8.56,4.7 9.72,5.87 | 6.15,30.26 TP_BAT_GND.TP | 16.8,11.55 17.37,12.12 17.82,12.12 C32.1 | 16.8,11.55 16.8,11.17 17.12,10.85 IC2.B1 | 17.02,13.04 16.36,12.38 16.36,11.99 16.8,11.55 | 17.02,13.04 17.18,13.2 18.2,13.2 v18.52,12.88 19.21,12.19 19.21,11.3 IC2.B3 | 17.02,13.04 14.71,15.36 14.71,15.74 14.83,15.87 14.89,15.87 15.09,16.06 R3.1 | IC3.9 16.67,16.57 17.12,16.57 IC3.8 17.12,16.63 17.12,17.01 v16.99,17.14 | v18.39,14.85 18.01,14.47 17.75,14.47 C19.2 | v19.53,15.68 19.66,15.8 19.66,16.31 C6.2 | v20.36,14.6 20.86,14.09 C20.2 | C16.2 29.5,21.84 29.5,21.14 C15.2 29.56,21.07 29.88,21.07 30.39,20.57 30.39,20.44 C11.2 30.39,20.38 30.39,20.25 29.95,19.8 29.69,19.8 | 29.69,19.8 29.18,19.8 C10.2 | v26.58,22.73 26.64,22.79 26.64,23.3 C13.2 | v24.61,23.8 22.77,23.8 C17.1
  Top 0.127: v29.69,19.74 29.69,19.8 | 29.12,10.03 30.58,10.03 30.71,10.15 C1-ED-DR.2 | 29.12,10.03 26.23,12.91 | 26.23,12.91 26.2,12.95 24.68,12.95 23.79,13.84 23.53,13.84 C21.2 | 29.12,10.03 R2_EP_DR.2 | C14.2 27.66,21.84 27.66,22.53 C12.2 27.72,22.53 29.12,22.53 29.18,22.6 29.82,22.6 31.02,21.39 31.02,19.99 29.5,18.47 29.37,18.47 C9.2 29.31,18.41 29.31,17.77 | 29.31,17.77 29.31,15.87 C8.2 | v26.45,14.28 26.26,14.09 25.95,14.09 C7.2 | 23.09,19.87 23.34,20.12 23.34,20.76 U1.P$B7 | U1.P$F23 27.6,19.55 26.96,19.55 26.71,19.8 U1.P$74 | U1.P$74 24.29,17.39 24.29,16.25 U1.P$88 24.36,16.25 25.44,16.25 U1.P$89 25.5,16.25 26.64,16.25 U1.P$90 | U1.P$74 23.09,18.6 23.09,17.45 U1.P$83 23.09,17.39 23.09,16.25 U1.P$87 | U1.P$79 23.09,18.66 U1.P$74 | 23.09,19.87 U1.P$75 | 23.09,19.87 U1.P$74 | U1.P$84 24.29,17.45 U1.P$74 | U1.P$85 25.44,17.45 24.87,18.03 U1.P$74 | U1.P$80 24.29,18.66 U1.P$74 | U1.P$81 25.5,18.66 U1.P$74 | U1.P$76 24.23,19.8 23.72,19.3 U1.P$74 | U1.P$77 25.5,19.8 26.07,19.23 U1.P$74 | U1.P$82 26.64,18.66 26.14,19.17 U1.P$74 | v28.74,17.77 29.31,17.77 | v26.45,13.14 26.23,12.91 | U1.P$78 26.71,19.87 U1.P$74 | C29.1 35.41,3.93 SW_DN.1 35.84,3.96 37.83,1.97 TP_GND.TP 39.22,3.09 39.22,9.14 40.1,10.03 40.1,10.41 J1.3 40.17,10.47 41.38,10.47 J1.5 41.44,10.47 41.95,10.47 42.77,11.3 43.03,11.3 44.36,12.63 44.36,14.59 45.47,15.7 45.47,18.73 44.69,19.51 43.7,19.51 42.6,18.41 37.63,18.41 C22.2 37.56,18.47 35.34,18.47 C4.2 35.28,18.53 35.22,18.6 33.82,18.6 | 11.56,27.52 11.91,27.17 R9.1 | 11.56,27.52 11.09,28 10.58,28 IC1.D2 | 11.56,27.52 12.23,28.19 12.23,29.27 C39.2 12.35,29.29 14.89,31.83 15.87,31.83 18.22,29.49 J4.SH4
  Top 0.127: J4.SH4 18.96,29.52 18.96,30.47 20.42,31.93 20.48,31.93 20.61,32.06 R2_USB.2 20.67,32.12 26.14,32.12 R1_USB.1 26.26,32.12 27.53,30.85 27.53,29.52 J4.SH3 | J4.A12_B1 20.04,28.95 19.59,28.95 19.02,29.52 J4.SH4 | 33.82,18.6 32.29,18.6 C3.2 | C33.2 35.53,25.84 35.53,26.6 C25.2 35.6,26.6 38.64,26.6 38.84,26.79 | J4.SH3 27.6,29.46 28.04,29.01 33.25,29.01 IC9.B1 33.31,28.95 IC9.C1 33.37,28.57 33.69,28.57 IC9.C2 33.75,28.57 34.07,28.57 IC9.C3 34.14,28.5 38.52,28.5 38.55,28.47 | 38.84,26.79 38.84,28.19 38.55,28.47 | J4.A1_B12 26.52,28.95 26.9,28.95 27.47,29.52 J4.SH3 | 33.82,18.6 33.82,20.19 33.93,20.29 36.6,20.29 37.13,19.76 38.12,19.76 42.45,24.1 43.84,24.1 45.17,25.44 45.17,28.7 43.12,30.75 41.84,30.75 41.14,30.05 41.14,29.1 38.84,26.79
  Bottom 0.127: v10.01,5.58 v12.42,3.17 | 19.25,15.96 19.4,16.12 20.36,16.12 | 19.25,15.96 18.39,15.11 v18.39,14.85 18.52,14.72 v18.52,12.88 | 20.61,16.12 22.96,16.12 23.02,16.19 U1.P$87 | 20.61,16.12 20.36,16.12 | v16.99,17.14 17.75,17.9 18.32,17.9 18.58,17.64 18.58,16.95 18.83,16.69 19.21,16.69 19.91,17.39 20.36,17.39 20.61,17.14 20.61,16.12 | 19.25,15.96 v19.53,15.68 | 20.36,16.12 v20.36,14.6 | 26.71,22.73 27.15,22.73 29.06,20.82 29.06,20.44 29.02,20.41 | 29.02,20.41 28.48,19.87 26.71,19.87 U1.P$78 | v24.61,23.8 26.07,25.27 26.45,25.27 26.48,25.23 | 26.48,25.23 26.71,25.01 26.71,22.73 | 26.71,22.73 v26.58,22.73 | 29.02,20.41 v29.69,19.74 | 28.07,17.8 28.1,17.84 28.1,18.22 27.72,18.6 26.71,18.6 U1.P$82 26.71,18.53 26.71,17.45 U1.P$86 | 28.07,17.8 27.91,17.64 27.91,16.06 26.45,14.6 v26.45,14.28 v26.45,13.14 | v28.74,17.77 28.1,17.77 28.07,17.8 | 26.48,25.23 26.52,25.27 26.52,28.44 27.53,29.46 J4.SH3
  pour Top: 382 corners
  pour Bottom: 384 corners
GND1
  Top 0.127: U1.P$D2 22.07,20.06 22.07,20.63 21.94,20.76 21.94,22.41 21.12,23.23 X2.2 21.44,22.98 22.2,23.74 C17.2
GND2
  Top 0.127: U1.P$F2 22.07,19.55 21.82,19.55 21.44,19.93 20.23,19.93 18.58,21.58 18.58,23.23 X2.1 18.52,23.3 18.01,23.8 17.44,23.8 C18\.2
GND3  (via drill 0.3)
  Top 0.127: v28.48,22.03 27.79,21.33 27.66,21.33 U1.P$A23 | v28.93,23.8 29.25,24.12 29.25,25.14 28.61,25.77 X1.3 28.48,25.77 28.1,26.15 28.1,26.85 C2.2
  Bottom 0.127: v28.48,22.03 28.48,23.36 v28.93,23.8
HAPTIC_EN  (via drill 0.3)
  Top 0.127: v20.17,16.95 21.05,16.95 21.18,16.82 21.56,16.82 U1.P$U1 | v17.88,12.76 17.37,12.76 v16.8,12.19 | v17.25,11.36 17.75,11.36 IC2.A1
  Bottom 0.127: v20.17,16.95 19.85,16.95 17.88,14.98 v17.88,12.76 | v16.8,12.19 16.8,11.8 v17.25,11.36
IMU_INT1
  Top 0.127: U1.P$N1 21.56,17.77 19.02,17.77 18.58,17.33 18.58,16.31 17.82,15.55 17.69,15.55 IC3.5
IMU_INT2  (1 unrouted)
LX1
  Top 0.127: IC9.B2 33.75,28.95 34.07,28.95 IC9.B3 34.14,29.01 36.99,29.01 37.5,29.52 L7.1
LX2
  Top 0.127: IC9.D2 33.75,28.19 34.07,28.19 IC9.D3 34.14,28.12 36.93,28.12 37.5,27.55 L7.2
MOSI  (1 unrouted)
N$1
  Top 0.127: U1.P$B3 22.39,20.82 22.39,22.85 L2.1
N$2
  Top 0.127: L2.2 23.41,22.85 23.41,22.41 23.85,21.96 L3\.1
N$3  (via drill 0.3)
  Top 0.127: 22.83,21.27 22.83,21.9 L3\.2 | 22.83,21.27 22.83,20.82 U1.P$B5 | U1.P$E24 28.17,19.8 28.61,19.8 C10.1 28.68,19.74 28.68,19.61 28.99,19.3 29.95,19.3 30.77,20.12 30.77,21.27 29.69,22.34 29.31,22.34 29.06,22.09 29.06,21.9 C16.1 28.99,21.84 28.99,21.14 C15.1 28.93,21.14 28.04,21.14 27.72,20.82 v27.21,20.82 | v23.15,21.27 22.83,21.27
  Bottom 0.127: v23.15,21.27 26.77,21.27 v27.21,20.82
N$4  (via drill 0.3)
  Top 0.127: v26.64,8.12 27.98,6.79 29.37,6.79 R1_EP_DR1.2 | R_TYPE_SEL.1 22.45,7.3 v22.45,6.79 23.15,6.09 23.85,6.09 SJ1.2
  Bottom 0.127: v26.64,8.12 25.31,8.12 23.09,10.34 22.71,10.34 22.45,10.09 v22.45,6.79
N$5
  Top 0.127: IC1.D1 10.2,28 10.2,27.93 11.53,26.6 11.91,26.6 R9.2
N$6
  Top 0.127: C2-EP-DR.2 23.47,9.33 24.99,9.33 Q3.3 | D5.2 24.93,11.68 24.93,9.52 24.99,9.45 Q3.3 | Q3.3 24.99,9.26 24.99,7.04 26.07,5.96 26.07,3.3 L5.1
N$7  (via drill 0.3)
  Top 0.127: v21.63,9.26 22.26,9.26 C2-EP-DR.1 | 18.07,7.74 17.82,7.74 D4.2 18.07,7.74 | 18.07,7.74 v20.1,7.74 | 18.07,7.74 18.07,5.71 D2.1
  Bottom 0.127: v20.1,7.74 v21.63,9.26
N$8
  Top 0.127: R1_USB.2 26.2,31.55 25.95,31.55 24.55,30.16 24.55,28.95 J4.A5
N$9
  Top 0.127: R2_USB.1 20.67,31.23 21.5,30.41 21.5,28.95 J4.B5
N$11
  Top 0.127: EDP_C2.2 11.47,22.09 11.09,22.09 10.77,21.77 10.45,21.77 J2.4
N$12
  Top 0.127: EDP_C1.2 11.47,21.14 10.51,21.14 10.45,21.2 J2.5
N$14
  Top 0.127: C32.2 18.26,12.12 18.26,11.36 IC2.A2
N$15
  Top 0.127: U1.P$A18 26.14,21.33 26.14,23.3 C13.1
N$19
  Top 0.127: U1.P$D23 27.66,20.06 27.91,20.06 28.04,20.19 29.69,20.19 29.88,20.38 C11.1
N$20  (via drill 0.3)
  Top 0.127: v28.61,20.63 28.48,20.76 28.17,20.76 U1.P$B24 | v26.26,24.82 26.9,24.82 27.09,24.63 X1.1 27.15,24.57 27.66,24.06 27.66,23.55 C1.1
  Bottom 0.127: v28.61,20.63 28.04,20.63 26.14,22.53 26.14,24.69 v26.26,24.82
N$21
  Top 0.127: IC9.D1 33.25,28.19 32.23,28.19 R1.2
N$22
  Top 0.127: IC9.E1 33.25,27.74 32.23,27.74 R2.2
N$27
  Top 0.127: EDP_C12.1 11.53,10.98 11.15,10.98 10.45,11.68 J2.24
N$28
  Top 0.127: IC3.1 16.1,15.04 15.59,15.04 15.15,15.49 R3.2
N$39
  Top 0.127: U1.P$AC5 22.83,15.23 20.99,15.23 20.93,15.17 C20.1
N$69
  Top 0.127: U1.P$N24 28.17,17.84 C9.1
N$74
  Top 0.127: L1.2 34.26,19.74 34.9,19.11 35.28,19.11 C4.1 35.34,19.11 37.56,19.11 C22.1 37.61,19.11 40.33,19.11 41.89,20.67 ANT1.1
N$75  (via drill 0.3)
  Top 0.127: v27.66,18.03 27.66,18.98 U1.P$H23 | v28.1,10.41 v26.01,12.5 | C3.1 32.29,19.23 32.48,19.04 v32.87,19.04 33.25,19.42 33.25,19.74 L1.1
  Bottom 0.127: v27.66,18.03 27.66,16.19 26.01,14.53 v26.01,12.5 | v28.1,10.41 28.8,10.41 32.1,7.1 32.48,7.1 32.87,7.49 v32.87,19.04
OUT+  (via drill 0.3)
  Top 0.127: v18.77,11.99 18.77,11.36 IC2.A3 | v19.02,15.11 v19.02,17.14 | v14.45,12.57 14.45,7.86 TP_OP.TP
  Bottom 0.127: v18.77,11.99 18.77,12.5 19.02,12.76 v19.02,15.11 | v19.02,17.14 19.02,18.15 16.61,20.57 16.61,21.33 16.29,21.65 14.52,21.65 10.71,17.84 10.71,16.31 v14.45,12.57
OUT-
  Top 0.127: IC2.C3 18.77,10.28 19.28,10.28 20.17,9.39 TP_ON.TP
P0.13  (via drill 0.3)
  Top 0.127: v22.9,9.9 22.96,9.96 22.96,14.22 23.47,14.72 23.6,14.72 U1.P$AD8 | v22.58,5.33 21.56,4.31 21.56,3.99 SW_UP.2 | C30.2 22.71,2.66 22.71,2.79 21.56,3.93 SW_UP.2 | R5.2 18.2,3.99 21.5,3.99 SW_UP.2
  Bottom 0.127: v22.9,9.9 22.9,5.64 v22.58,5.33
P0.14  (via drill 0.3)
  Top 0.127: C31.2 11.66,2.66 11.66,2.85 10.58,3.93 SW_ENT.2 10.58,3.99 10.58,4.31 11.4,5.14 11.66,5.14 R8.2 11.72,5.14 12.1,5.52 v14.83,5.52 | v23.41,15.23 23.85,15.23 U1.P$AC9
  Bottom 0.127: v23.41,15.23 24.29,15.23 25.06,14.47 25.06,13.45 22.14,10.53 19.85,10.53 v14.83,5.52
P1.01  (via drill 0.3)
  Top 0.127: v28.93,13.9 27.66,15.17 27.66,15.99 U1.P$Y23 | v32.1,9.77 32.1,9.2 32.36,8.95 Q1.1 32.42,8.95 R_PWR_EPD.2
  Bottom 0.127: v28.93,13.9 28.93,12.95 v32.1,9.77
P1.02  (via drill 0.3)
  Top 0.127: C29.2 33.75,2.72 32.55,3.93 SW_DN.2 32.61,3.99 32.61,4.82 R7.2 32.67,4.82 32.29,5.2 v32.29,7.55 | v28.68,16.44 28.55,16.31 28.17,16.31 U1.P$W24
  Bottom 0.127: v28.68,16.44 28.68,14.28 28.48,14.09 28.48,11.36 v32.29,7.55
PMIC_INT  (via drill 0.3)
  Top 0.127: v22.07,16.57 22.07,17.01 U1.P$T2 | v10.2,29.71 10.2,29.27 IC1.A1
  Bottom 0.127: v22.07,16.57 22.07,17.01 10.2,28.88 v10.2,29.71
PREVGH  (via drill 0.3)
  Top 0.127: J2.21 10.45,13.26 12.36,13.26 EDP_C9.2 12.42,13.33 12.48,13.39 v12.48,13.9 | v20.42,11.68 21.37,11.68 D5.1
  Bottom 0.127: v20.42,11.68 19.85,11.68 19.09,10.91 15.47,10.91 v12.48,13.9
PREVGL
  Top 0.127: J2.23 10.45,12.19 10.77,12.19 11.15,11.8 12.29,11.8 EDP_C11.1 12.36,11.74 12.48,11.61 12.48,6.91 13.36,6.03 16.41,6.03 17.44,5.01 18.71,5.01 19.34,5.64 21.5,5.64 D2.2
RESE  (via drill 0.3)
  Top 0.127: 27.69,6.44 26.2,7.93 26.2,9.14 27.09,10.03 Q3.2 | 27.69,6.44 27.72,6.41 29.69,6.41 29.82,6.53 29.82,6.91 29.44,7.3 R1_EP_DR1.1 | v9.24,21.33 10.07,22.15 10.39,22.15 J2.3 | v27.66,6.41 27.69,6.44
  Bottom 0.127: v9.24,21.33 9.24,9.58 14.2,4.63 25.88,4.63 v27.66,6.41
RESET  (via drill 0.3)  (1 unrouted)
  Top 0.127: v41.88,11.1 41.44,11.55 41.44,11.68 J1.6 | v43.66,7.8 43.66,4.95 TP_RESET.TP
  Bottom 0.127: v41.88,11.1 41.88,9.58 v43.66,7.8
SCK  (via drill 0.3)
  Top 0.127: v23.98,22.73 24.55,22.15 24.55,21.33 U1.P$A12 | v16.17,23.93 16.17,23.68 15.53,23.04 v15.53,21.2 | v11.15,17.64 10.77,17.26 10.45,17.26 J2.13
  Bottom 0.127: v23.98,22.73 17.88,22.73 17.82,22.66 17.44,22.66 16.86,23.23 16.86,23.49 16.42,23.93 v16.17,23.93 | v15.53,21.2 14.71,21.2 v11.15,17.64
SCL  (via drill 0.3)  (1 unrouted)
  Top 0.127: 33.75,24.44 37.38,24.44 TP_SCL.TP | 33.75,24.44 33.31,24.44 R17.1 | v31.09,27.81 31.47,28.19 31.6,28.19 R1.1 | 33.75,24.44 v33.75,24.82 | 15.37,16.41 15.72,16.06 15.72,15.8 15.98,15.55 16.1,15.55 IC3.12 | 15.37,16.41 15.34,16.44 14.83,16.44 13.88,15.49 13.88,14.09 15.12,12.84 15.12,10.88 15.72,10.28 17.75,10.28 IC2.C1 | v9.69,29.01 9.82,28.88 10.13,28.88 IC1.B1 | U2.7 17.82,19.93 v18.52,19.93 18.96,19.49 18.96,19.11 18.45,18.6 17.44,18.6 15.4,16.57 15.4,16.44 15.37,16.41
  Bottom 0.127: v33.75,24.82 31.09,27.49 v31.09,27.81 30.9,27.81 27.34,31.36 7.21,31.36 6.96,31.11 6.96,30.73 7.21,30.47 7.85,30.47 8.04,30.66 8.42,30.66 9.69,29.39 v9.69,29.01 18.52,20.19 v18.52,19.93
SDA  (via drill 0.3)  (1 unrouted)
  Top 0.127: R18.1 32.29,24.44 32.29,25.52 31.72,26.09 TP_SDA.TP 31.66,26.15 31.66,27.3 | 31.66,27.3 31.66,27.68 R2.1 | v9.69,28.38 10.13,28.38 IC1.C1 | v15.15,25.58 v12.48,25.58 | v17.63,23.11 17.63,20.57 17.75,20.44 U2.8 17.82,20.38 18.71,20.38 19.88,19.2 | 19.88,19.2 20.74,18.34 21.56,18.34 U1.P$L1 | v16.67,15.55 16.67,15.04 IC3.2 | 19.88,19.2 v18.13,17.45 | v22.07,27.3 31.66,27.3
  Bottom 0.127: v12.48,25.58 v9.69,28.38 | v15.15,25.58 v17.63,23.11 17.63,23.17 21.75,27.3 v22.07,27.3 | v16.67,15.55 17.31,15.55 18.13,16.38 v18.13,17.45
SWDCLK  (via drill 0.3)
  Top 0.127: U1.P$AA24 28.17,15.74 28.29,15.61 28.29,15.55 28.74,15.11 31.15,15.11 33.75,17.71 v39.28,17.71 43.84,17.71 TP_SWDCLK.TP | v39.34,12.5 40.1,11.74 J1.4
  Bottom 0.127: v39.34,12.5 39.34,13.2 39.28,13.26 v39.28,17.71
SWDIO
  Top 0.127: 38.62,16.44 32.87,16.44 31.28,14.85 28.55,14.85 28.17,15.23 U1.P$AC24 | 39.15,16.3 39.15,13.07 38.9,12.82 38.9,11.74 J1.2 | 39.15,16.3 44.27,16.69 | TP_SWDIO.TP 44.27,16.69 | 38.62,16.44 38.87,16.69 44.27,16.69 | 38.62,16.44 39.01,16.44 39.15,16.3
SWO
  Top 0.127: U1.P$AD22 27.15,14.72 27.15,14.09 27.79,13.45 31.6,13.45 33.06,14.91 TP_SWO.TP
VBAT  (via drill 0.3)
  Top 0.127: 15.09,19.42 15.79,19.42 U2.3 15.85,19.49 15.85,19.87 U2.2 | 15.09,19.42 14.71,19.42 C27.2 | v11.78,28.38 10.58,28.38 IC1.C2 | TP_VBAT.TP 15.47,30.48 v13.37,28.38 13.37,27.42 12.16,26.22 11.21,26.22 9.05,28.38 9.05,30.79 C37.2 | 15.09,19.42 15.09,24.38 v15.4,24.69
  Bottom 0.127: v11.78,28.38 v13.37,28.38 13.37,26.73 v15.4,24.69
VBUS  (via drill 0.3)
  Top 0.127: 9.18,6.41 9.18,6.64 C43.1 9.18,6.76 9.18,8.12 v9.37,8.31 | 9.18,6.41 9.18,5.9 C42.2 | 9.18,6.41 7.53,6.41 D3.5 | v21.63,14.72 22.07,14.72 U1.P$AD2 | v22.2,13.2 22.2,13.64 22.39,13.84 C21.1 | v9.62,30.92 10.64,29.9 10.64,29.52 10.58,29.46 10.58,29.27 IC1.A2 | 6.83,30.92 6.58,30.92 6.51,30.85 C38.2 | 6.83,30.92 v7.4,30.92 | v20.36,30.92 20.99,30.28 20.99,29.77 20.93,29.71 20.93,28.95 J4.A9_B4 | v24.99,29.96 25.63,29.33 25.63,28.95 J4.A4_B9 | v16.17,21.14 16.17,23.04 v16.42,23.3 | 6.83,30.92 v6.83,30.22
  Bottom 0.127: v21.63,14.72 21.63,13.77 21.66,13.74 | v22.2,13.2 21.66,13.74 | v7.4,30.92 v9.62,30.92 11.34,30.92 | 11.34,30.92 v20.36,30.92 21.31,29.96 v24.99,29.96 | v16.17,21.14 16.17,13.84 18.45,11.55 18.96,11.55 21.12,13.71 21.63,13.71 21.66,13.74 | v16.42,23.3 16.17,23.3 11.34,28.12 11.34,30.92 | v9.37,8.31 9.37,8.44 7.4,10.41 7.4,29.65 v6.83,30.22
VREG
  Top 0.127: IC1.B2 10.58,28.88 11.28,28.88 11.66,29.27 C39.1 11.72,29.33 11.72,29.46 14.77,32.51 30.83,32.51 C23.1 32.87,30.47 32.87,29.9 33.31,29.46 IC9.A1 33.31,29.39 33.69,29.39 IC9.A2 33.75,29.39 34.07,29.39 IC9.A3 34.07,29.46 34.45,29.84 34.45,30.6 C24.2 34.52,30.66 36.8,32.95 38.62,32.95 TP_VREG.TP